# EAGLE board XIAO ESP32C3 (EAGLE 6.4)
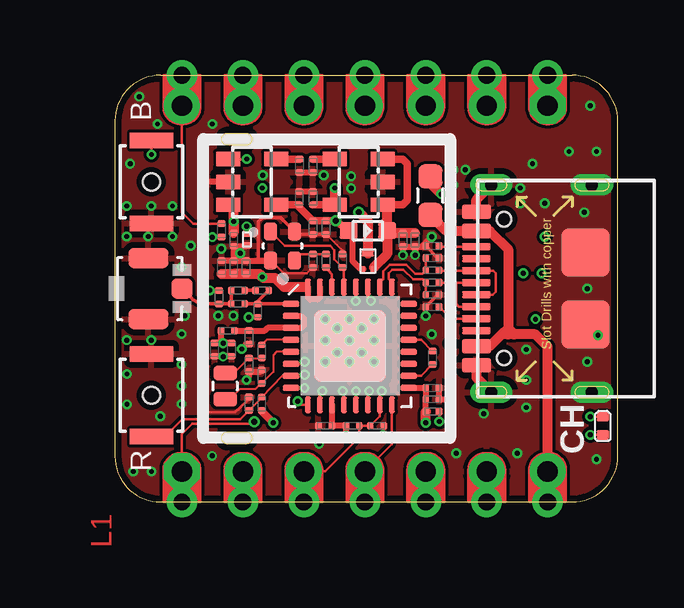
[diagram p0: board, top side]
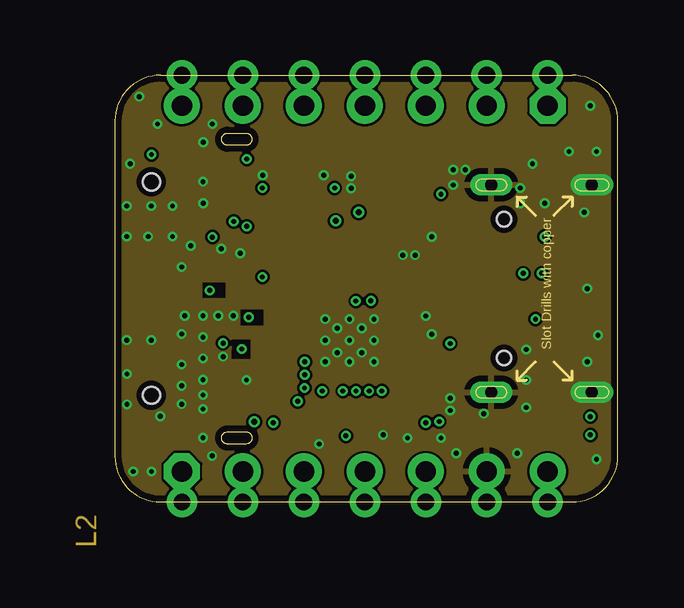
[diagram p1: board, inner layer Route2]
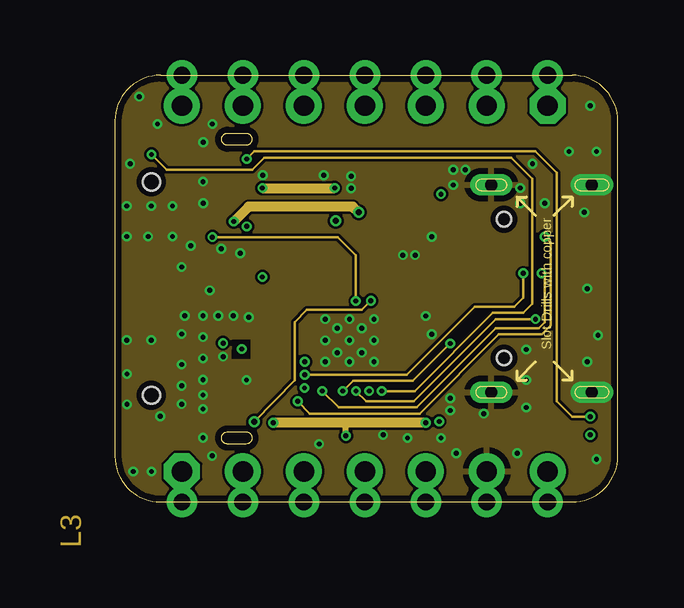
[diagram p2: board, inner layer Route15]
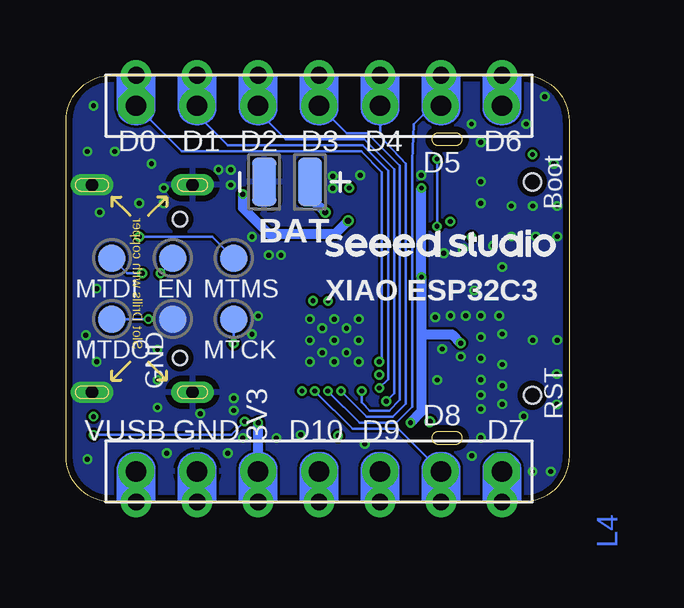
[diagram p3: board, bottom side, seen from below]

Size 20.95 x 17.78 mm. Coordinates in mm from the lower left corner, seen from the top.
Outline: 20.95,1.9 20.95,15.88 arc90 19.05,17.78 1.91,17.78 arc90 0,15.88 0,1.9 arc90 1.91,0 19.05,0 arc90 20.95,1.9
Outline: 4.7,2.92 5.46,2.92 arc-90 5.72,2.67 arc-90 5.46,2.41 4.7,2.41 arc-90 4.44,2.67 arc-90 4.7,2.92
Outline: 4.7,15.37 5.46,15.37 arc-90 5.72,15.11 arc-90 5.46,14.86 4.7,14.86 arc-90 4.44,15.11 arc-90 4.7,15.37
Copper layers (1*2*15*16): Top 0.035mm / dielectric 0.2mm / Route2 0.0175mm / dielectric 0.3mm / Route15 0.0175mm / dielectric 0.2mm / Bottom 0.035mm
Design rules "SeeedStudio_4layer_DRU_no_angle_20140221 *": minimum track width 1mil, minimum drill 8mil, track to track 4mil, track to pad 4mil, pad to pad 4mil, via to via 4mil, smd to smd 0mil, copper to edge 10mil, drill to drill 8mil, minimum pad ring 4mil, minimum via ring 4mil, stop-mask expansion 4mil, vias tented up to drill 25mil, thermal gap 10mil
Net classes: 0 default: width 0.089 mm, drill 0.2 mm, clearance 0.102 mm
tRestrict: area 3.7,8.5 to 4.6,9.1; area 5.3,7.4 to 6.2,8; area 4.9,6 to 5.6,6.7

## Footprints (pad centres in the part's own frame; a part is rotated, then mirrored left to right if it is on the bottom)
U-FL3P-SMD-2.6X2.6X1.0MM = smd 0.889 x 0.838: D -1.397,0 | smd 1.676 x 0.838: GND1 0,1.27; GND2 0,-1.27
TP-80X40MIL = smd 2.032 x 1.016: 1 0,0
BUTTON_TD1183SA = smd 0.65 x 1.8: 1 -1.725,0; 2 1.725,0 | hole 0.7: 0,0
C0201 = smd 0.279 x 0.318: 1 -0.279,0; 2 0.279,0
LED-0402 = smd 0.385 x 0.508: + -0.383,0; - 0.383,0
SOD-523 = smd 0.762 x 0.7: + 0.8,0; - -0.8,0
F0603 = smd 1 x 1: 1 -0.8,0; 2 0.8,0
H7-HALF-HOLE-2.54 = drill 0.85 pad 1.5 octagon: 1 0,7.62 | drill 0.85 pad 1.5: 2 0,5.08; 3 0,2.54; 4 0,0; 5 0,-2.54; 6 0,-5.08; 7 0,-7.62 | drill 0.7 pad 1.27: 13 -1.27,7.62; 14 -1.27,5.08; 15 -1.27,2.54; 16 -1.27,0; 17 -1.27,-2.54; 18 -1.27,-5.08; 19 -1.27,-7.62
L0201 = smd 0.279 x 0.318: 1 -0.279,0; 2 0.279,0
PMOS_1.0*0.6*0.35MM = smd 0.5 x 0.25: 1 0,0.325 | smd 0.15 x 0.25: 2 -0.175,-0.325; 3 0.175,-0.325
R0201 = smd 0.279 x 0.318: 1 -0.279,0; 2 0.279,0
R0201' = smd 0.279 x 0.318: 1 -0.254,0; 2 0.254,0
TP-D45MIL = smd 1.143 x 1.143: T 0,0
SOT-25 = smd 0.6 x 1: 1 -0.95,-1; 2 0,-1; 3 0.95,-1; 4 0.95,1; 5 -0.95,1
QFN32G-0.5-5X5MM = smd 0.25 x 0.7: 1 -1.75,-2.45; 2 -1.25,-2.45; 3 -0.75,-2.45; 4 -0.25,-2.45; 5 0.25,-2.45; 6 0.75,-2.45; 7 1.25,-2.45; 8 1.75,-2.45; 17 1.75,2.45; 18 1.25,2.45; 19 0.75,2.45; 20 0.25,2.45; 21 -0.25,2.45; 22 -0.75,2.45; 23 -1.25,2.45; 24 -1.75,2.45 | smd 0.7 x 0.25: 9 2.45,-1.75; 10 2.45,-1.25; 11 2.45,-0.75; 12 2.45,-0.25; 13 2.45,0.25; 14 2.45,0.75; 15 2.45,1.25; 16 2.45,1.75; 25 -2.45,1.75; 26 -2.45,1.25; 27 -2.45,0.75; 28 -2.45,0.25; 29 -2.45,-0.25; 30 -2.45,-0.75; 31 -2.45,-1.25; 32 -2.45,-1.75 | smd 3 x 3: 33 0,0
USB2.0-TYPE-C = smd 1.2 x 0.6: A1_B12 0.05,3.2; A4_B9 0.05,2.4; B1_A12 0.05,-3.2; B4_A9 0.05,-2.4 | smd 1.2 x 0.3: A5 0.05,1.25; A6 0.05,0.25; A7 0.05,-0.25; A8 0.05,-1.25; B5 0.05,-1.75; B6 0.05,-0.75; B7 0.05,0.75; B8 0.05,1.75 | drill 0.508 pad 0.889 long: S1 -4.763,4.318; S2 -4.763,-4.318; S3 -0.572,4.318; S4 -0.572,-4.318 | smd 2 x 2: S5 -4.5,1.5; S6 -4.5,-1.5 | hole 0.6: -1.1,-2.89; -1.1,2.89
X2-SMD-1.6X1.0X0.5MM = smd 0.6 x 1: 1 -0.55,0; 2 0.55,0
X4-SMD-2.0X1.6X0.5MM = smd 0.75 x 0.55: 1 -0.6,-0.5; 2 0.6,-0.5; 3 0.6,0.5; 4 -0.6,0.5

## Placement (x,y rotation side)
ANT  U.FL-R-SMT-1  [U-FL3P-SMD-2.6X2.6X1.0MM]  1.4,8.89 180 top
BAT  DNP  [TP-80X40MIL]  10.8,13.34 270 bottom
BOOT  TD-1183SN-A3N-D1R  [BUTTON_TD1183SA]  1.52,13.34 90 top
C1  2.2uF  [C0201]  12.51,10.92 270 top
C2  1uF  [C0201]  13.23,4.28 180 top
C3  100nF  [C0201]  13.23,4.75 180 top
C4  2.2uF  [C0201]  12,10.92 270 top
C5  100nF  [C0201]  5.59,4.09 270 top
C6  10pF  [C0201]  10.92,3.17 180 top
C7  100nF  [C0201]  8.76,3.17 0 top
C8  18pF  [C0201]  5.59,5.71 270 top
C9  18pF  [C0201]  6.12,5.22 90 top
C10  100nF  [C0201]  8.25,11.43 90 top
C11  DNP  [C0201]  13.23,8.64 180 top
C12  DNP  [C0201]  13.23,10.16 180 top
C13  DNP  [C0201]  8.25,14.01 90 top
C14  1.6pF  [C0201]  5.96,7.98 90 top
C15  0R  [C0201]  6.13,8.81 180 top
C23  2.2uF  [C0201]  8.25,12.66 270 top
C39  2.2uF  [C0201]  7.68,12.66 270 top
C40  2.2uF  [C0201]  4.95,10.93 270 top
C41  18pF  [C0201]  8.25,10.05 270 top
C42  18pF  [C0201]  9.49,10.05 90 top
C43  2.2uF  [C0201]  4.44,9.78 270 top
C44  1uF  [C0201]  5.46,9.78 270 top
C45  100nF  [C0201]  4.95,9.78 270 top
C48  1.6pF  [C0201]  4.34,8.53 270 top
C49  0R  [C0201]  5.13,8.81 180 top
C50  100nF  [C0201]  5.59,6.86 90 top
C53  100nF  [C0201]  4.86,6.35 90 top
C54  2.2uF  [C0201]  4.15,6.35 90 top
CHG  RED  [LED-0402]  20.33,3.17 90 top
D1  MSK4005  [SOD-523]  10.54,11.3 180 top
F1  6V_500mA_Fuse  [F0603]  13.14,12.76 90 top
GND  DNP  [TP-80X40MIL]  12.7,13.34 270 bottom
J1  DNP  [H7-HALF-HOLE-2.54]  10.41,1.27 90 top
J2  DNP  [H7-HALF-HOLE-2.54]  10.41,16.51 270 top
L1  2nH  [L0201]  5.13,8.25 0 top
L3  2nH  [L0201]  4.7,7.14 0 top
Q1  LP0404N3T5G  [PMOS_1.0*0.6*0.35MM]  10.54,10.03 0 top
R1  5.1k  [R0201]  13.23,10.67 0 top
R2  5.1k  [R0201]  13.23,8.13 180 top
R3  DNP  [R0201]  13.23,6.01 270 top
R4  10k  [R0201]  6.12,4.09 270 top
R5  1R  [R0201]  4.44,11.32 270 top
R6  10k  [R0201]  9.91,3.17 180 top
R7  0R  [R0201]  6.12,6.27 270 top
R8  22R  [R0201]  13.23,9.65 180 top
R9  100k  [R0201]  8.8,11.43 90 top
R10  22R  [R0201]  13.23,9.14 180 top
R21  DNP  [R0201']  5.5,10.93 270 top
R22  2.7k  [R0201]  7.7,14.01 270 top
R31  2.2k  [R0201]  13.23,3.77 0 top
R32  0R  [R0201]  8.8,10.05 90 top
RST  TD-1183SN-A3N-D1R  [BUTTON_TD1183SA]  1.52,4.45 270 top
TP1  DNP  [TP-D45MIL]  16.51,7.62 90 bottom
TP2  DNP  [TP-D45MIL]  13.97,10.16 90 bottom
TP3  DNP  [TP-D45MIL]  19.05,10.16 90 bottom
TP4  DNP  [TP-D45MIL]  13.97,7.62 90 bottom
TP5  DNP  [TP-D45MIL]  19.05,7.62 90 bottom
TP6  DNP  [TP-D45MIL]  16.51,10.16 90 bottom
U1  [SOT-25]  5.72,13.34 270 top
U2  XC6210B332MR  [SOT-25]  10.16,13.34 90 top
U4  ESP32-C3FN4  [QFN32G-0.5-5X5MM]  9.79,6.5 270 top
U$2  [LOGO-SEEED-NEW-1X9.6MM]  10.16,10.16 0 bottom
USB  UBF31-0171  [USB2.0-TYPE-C]  15.11,8.89 180 top
X2  32.768k/9KAA32768122TF90QT  [X2-SMD-1.6X1.0X0.5MM]  4.6,4.83 90 top
X4  40MHz/306011037  [X4-SMD-2.0X1.6X0.5MM]  6.98,10.67 270 top

## Library data of the parts
ANT J1 J2 = Connector-new
BAT C1-C15 C23 C39-C45 C48-C50 C53 C54 D1 F1 GND L1 L3 R1-R10 R22 R31 R32 X2 X4 = Discrete-new
BOOT RST = BUTTON_TD1183SA
CHG = Discrete-small
Q1 = PMOS_1006
R21 = GroveX
TP1-TP6 = Discrete-new; PARTNO: DNP
U1 U2 = PMIC
U4 = IC-new
U$2 = logo
USB = USB C

## Nets
32K_N: C9.1 U4.5 X2.1
32K_P: R7.1 U4.4
!CHG: CHG.- R21.1 U1.1
D0: J2.1 J2.13 U4.6
D1: J2.2 J2.14 U4.8
D2: J2.3 J2.15 TP2.T U4.9
D3: J2.4 J2.16 TP3.T U4.10
D4: J2.5 J2.17 TP4.T U4.12
D5: J2.6 J2.18 TP5.T U4.13
D8: J1.2 J1.14 U4.14
D9: BOOT.2 C6.2 J1.3 J1.15 R6.1 U4.15
D10: J1.4 J1.16 U4.16
DM: R10.1 USB.A7 USB.B7
DP: R8.1 USB.A6 USB.B6
EN: C5.2 R4.1 RST.2 TP6.T U4.7
ESP_USB_DM: C11.2 R10.2 U4.25
ESP_USB_DP: C12.2 R8.2 U4.26
GND: ANT.GND1 ANT.GND2 BOOT.1 C1.2 C2.1 C3.1 C4.2 C5.1 C6.1 C7.1 C8.2 C9.2 C10.1 C11.1 C12.1 C13.1 C14.1 C23.1 C39.1 C40.2 C41.2 C42.2 C43.1 C44.1 C45.1 C48.1 C50.1 C53.1 C54.1 GND.1 J1.6 J1.18 R1.1 R2.2 R9.1 R21.2 R22.2 RST.1 TP1.T U1.2 U2.2 U4.33 USB.A1_B12 USB.B1_A12 USB.S1 USB.S2 USB.S3 USB.S4 USB.S5 USB.S6 X4.2 X4.4
N$1: R2.1 USB.A5
N$2: R1.2 USB.B5
N$3: R3.1 U4.21
N$4: C8.1 R7.2 X2.2
N$5: C13.2 U2.4
N$6: C15.2 C49.1
N$11: R22.1 U1.5
N$12: CHG.+ R31.2
N$22: C14.2 C15.1 L1.2 U4.1
N$26: C41.1 R32.2 X4.3
N$27: C42.1 U4.29 X4.1
N$28: ANT.D C48.2 C49.2 L1.1
N$29: R5.2 U4.28
N$34: C50.2 L3.2 U4.2 U4.3
N$36: R32.1 U4.30
RX_D7: J1.1 J1.13 U4.27
TX_D6: J2.7 J2.19 R5.1
USB_FUSED_5V: C10.2 C39.2 D1.+ F1.2 Q1.2 R9.2 U1.4
VBAT: BAT.1 C40.1 Q1.1 U1.3
VCC_3V3: C2.2 C3.2 C7.2 C23.2 C43.2 C44.2 C45.2 C53.2 C54.2 J1.5 J1.17 L3.1 R4.2 R6.2 R31.1 U2.5 U4.11 U4.17 U4.31 U4.32
VDD_SPI: R3.2 U4.18
VIN: C1.1 C4.1 D1.- Q1.3 U2.1 U2.3
VUSB: F1.1 J1.7 J1.19 USB.A4_B9 USB.B4_A9

## Tracks (layer width: path | path; a pad name or v marks a point on that pad's centre or on a via)
32K_N
  Top 0.089: U4.5 6.73,6.25 6.6,6.12 6.6,5.42 C9.1 6.08,4.94 5.84,4.7 5.21,4.7 4.78,4.28 X2.1
32K_P
  Top 0.089: U4.4 6.32,6.75 R7.1
!CHG  (via drill 0.2 pad 0.41)
  Top 0.102: CHG.- 19.69,3.56 v19.81,3.56 | v5.5,14.29 U1.1 | R21.1 v5.5,11.48
  Route15 0.102: v19.81,3.56 19.05,3.56 18.42,4.19 18.42,13.72 17.53,14.61 5.82,14.61 v5.5,14.29
  Bottom 0.102: v5.5,11.48 v5.5,14.29
D0  (via drill 0.2 pad 0.41)
  Top 0.102: U4.6 7.81,5.75 v7.91,5.84
  Bottom 0.102: J2.13 J2.1 16.13,14.61 8.66,14.61 7.8,13.74 7.8,6.49 7.8,5.99 7.8,5.96 v7.91,5.84
D1  (via drill 0.2 pad 0.41)
  Top 0.102: U4.8 v7.9,4.75
  Bottom 0.102: J2.14 J2.2 15.49,16.13 14.22,14.86 8.61,14.86 7.54,13.79 7.54,5.11 v7.9,4.75
D2  (via drill 0.2 pad 0.41)
  Top 0.102: U4.9 7.76,4.05 v7.62,4.19
  Route15 0.102: 7.75,4.06 v7.62,4.19 8.13,3.68 12.7,3.68 16,6.98 17.78,6.98 18.16,7.37 18.16,10.79 v17.91,11.05
  Bottom 0.102: J2.15 J2.3 12.95,16.13 12.83,16.13 11.81,15.11 8.52,15.11 7.27,13.86 7.27,4.54 v7.62,4.19 | v17.91,11.05 14.86,11.05 TP2.T
D3  (via drill 0.2 pad 0.41)
  Top 0.102: U4.10 8.54,4.53 v8.64,4.62
  Route15 0.102: v8.64,4.62 9.32,3.94 12.57,3.94 15.88,7.24 17.65,7.24 17.91,7.49 17.91,9.4 v17.78,9.52
  Bottom 0.102: 10.29,16.38 J2.4 9.27,15.37 8.41,15.37 7.05,14.01 7.05,4.25 7.49,3.81 8.3,3.81 8.64,4.15 v8.64,4.62 | 10.29,16.38 10.29,17.65 J2.16 | 10.29,16.38 10.29,15.88 | v17.78,9.52 18.42,9.52 TP3.T
D4  (via drill 0.2 pad 0.41)
  Top 0.102: U4.12 9.54,4.58 v9.5,4.62
  Route15 0.102: v9.5,4.62 9.93,5.05 12.42,5.05 v13.97,6.6
  Bottom 0.102: J2.17 J2.5 7.87,15.24 6.79,14.1 6.79,4.1 7.34,3.56 8.43,3.56 v9.5,4.62 | v13.97,6.6 TP4.T
D5  (via drill 0.2 pad 0.41)
  Top 0.102: v10.05,4.62 10.05,4.18 U4.13
  Route15 0.102: v17.53,7.62 15.88,7.62 12.45,4.19 10.48,4.19 v10.05,4.62
  Bottom 0.102: J2.18 J2.6 5.72,16.51 6.48,15.75 6.54,14.22 6.54,3.96 7.2,3.3 8.72,3.3 v10.05,4.62 | v17.53,7.62 TP5.T
D8  (via drill 0.2 pad 0.41)
  Top 0.102: J1.14 J1.2 | U4.14 10.54,4.57 v10.59,4.62
  Bottom 0.102: J1.2 7.11,3.05 9.02,3.05 v10.59,4.62
D9  (via drill 0.2 pad 0.41)
  Top 0.102: J1.15 J1.3 8.76,1.27 10.19,2.69 R6.1 C6.2 11.04,3.57 U4.15 11.04,4.54 v11.12,4.62 | v1.52,14.48 BOOT.2
  Route15 0.102: v11.12,4.62 12.5,4.62 15.75,7.87 17.02,7.87 17.4,8.25 17.4,13.46 16.51,14.35 6.22,14.35 5.72,13.84 2.16,13.84 v1.52,14.48
D10
  Top 0.102: U4.16 11.54,2.4 J1.4
  Bottom 0.102: J1.16 J1.4
DM
  Top 0.102: USB.A7 14.22,9.14 | 14.22,9.14 13.49,9.14 R10.1 | USB.B7 14.33,8.14 14.22,8.25 14.22,9.14
DP
  Top 0.102: USB.A6 15.75,8.64 15.88,8.76 15.88,9.52 15.76,9.64 USB.B6 13.5,9.64 R8.1
EN  (via drill 0.2 pad 0.41)
  Top 0.089: U4.7 6.98,5.25 R4.1
  Top 0.102: U4.7 7.87,5.25 v7.91,5.3 | R4.1 6.1,4.32 C5.2 5.22,3.45 2.81,3.45 2.29,2.92 1.72,2.92 RST.2
  Route15 0.102: v7.91,5.3 12.15,5.3 14.99,8.13 16.64,8.13 17.02,8.51 v17.02,9.52
  Bottom 0.102: TP6.T 16.51,10.03 v17.02,9.52
ESP_USB_DM
  Top 0.102: C11.2 R10.2 12.83,9.27 12.42,9.27 12.02,9.67 11.55,9.67 11.4,9.52 11.4,9.3 11.54,9.16 U4.25
ESP_USB_DP
  Top 0.102: C12.2 R8.2 12.81,9.51 12.52,9.51 12.14,9.89 11.46,9.89 11.19,9.61 11.19,9.28 11.04,9.14 U4.26
GND  (via drill 0.2 pad 0.41)
  Top 0.102: C41.2 8,9.52 7.03,9.52 X4.2 | C42.2 9.49,10.46 R9.1 | C6.1 11.2,2.82 v11.18,2.79 | 3.81,3.73 5,3.73 5.14,3.86
  Top 0.127: 5.55,4.27 5.14,3.86
  Top 0.145: C14.1 v5.58,7.7 | C48.1 v3.95,8.81
  Top 0.152: C11.1 13.46,8.64 R2.2 v12.95,7.75 | C12.1 13.46,10.16 R1.1 | X4.4 6.91,11.85 6.13,11.85 5.97,11.68 5.97,10.06 | 7.6,11.15 C10.1 R9.1 | 5.59,4.34 C5.1 5.55,4.27 | 3.81,3.73 v3.67,3.87
  Top 0.254: C1.2 C4.2 v12,10.29 | C1.2 12.93,10.64 R1.1 12.95,10.79 | 12.95,10.79 v13.21,11.05 | C45.1 C44.1 5.97,10.06 6.47,10.06 X4.2 | C45.1 C43.1 | 5.08,10.06 C45.1 | C9.2 6.06,5.44 C8.2 5.59,5.23 v5.49,5.08 | C1.2 v12.51,10.29 | 7.6,11.15 X4.4 | R21.2 5.47,10.66 C40.2 C45.1 | R22.2 C13.1 | C39.1 C23.1 | U1.2 3.68,13.34 v3.67,13.35 | C3.1 C2.1 13.93,4.28 v13.97,4.32 | C1.2 12.8,10.64 12.95,10.79 | C50.1 5.47,6.58 v5.28,6.38 | C53.1 C54.1
  Top 0.406: USB.B1_A12 15.06,12.59 USB.S4 | USB.A1_B12 15.06,5.19 USB.S3
  Bottom 0.406: 12.51,12.76 GND.1
  other vias: 9.78,6.73 8.76,7.62 10.8,7.62 10.8,6.73 10.8,5.84 9.78,5.84 8.76,5.84 8.76,6.73 9.78,7.62 4.51,6.06 3.67,5.98 3.67,6.87 3.67,5.09 2.91,7.76 3.67,2.68 2.78,9.79 3.16,10.68 2.78,4.08 17.14,3.94 0.5,12.33 1.51,12.33 2.4,12.33 0.5,11.06 1.38,11.06 2.4,11.06 0.5,6.74 1.51,6.74 2.78,7 2.78,5.73 17.14,5.08 18.92,14.61 19.81,16.51 4.06,15.75 3.68,12.45 17.14,6.35 19.56,12.06 19.69,8.89 19.69,5.84 20.07,1.78 16.76,2.03 9.84,13.58 8.7,13.61 9.84,13.07 3.67,4.46 4.05,1.92 8.51,2.41 3.67,7.76 4.43,10.55 5.22,10.36 13.97,3.81 20.07,14.61 14.1,13.84 14.1,13.21 15.37,3.68 6.16,13.61 3.68,14.99 16.89,13.08 16.89,12.45 14.61,13.84 17.91,12.45 17.4,14.1 13.21,6.98 1.78,15.75 1.02,16.89 0.64,14.1 0.51,5.33 0.51,4.06 0.76,1.27 1.52,1.27 14.22,2.03 12.19,2.67 13.59,2.67 20.13,6.95 2.78,4.84 1.89,3.57 4.94,7.76 4.31,7.76 9.27,7.24 10.29,7.24 10.29,6.22 9.27,6.22
  pour Top (isolate 0.127): -0.13,17.78 21.08,17.78 21.08,0 -0.13,0
  pour Route2: -0.13,17.78 21.08,17.78 21.08,0 -0.76,0 -0.76,1.9 -0.13,1.9
  pour Route15: -0.13,17.78 21.08,17.78 21.08,0 -1.4,0 -1.4,1.9 -0.13,1.9
  pour Bottom: -0.13,17.78 21.08,17.78 21.08,0 -2.03,0 -2.03,1.9 -0.13,1.9
N$1
  Top 0.102: USB.A5 14,7.64 R2.1
N$2
  Top 0.102: USB.B5 13.54,10.64 R1.2
N$3
  Top 0.102: U4.21 12.77,6.75 R3.1
N$4
  Top 0.089: C8.1 R7.2 | 4.87,5.63 X2.2 5.07,5.48 C8.1 | C8.1 5.39,5.79
N$5
  Top 0.305: C13.2 U2.4
N$6
  Top 0.145: C49.1 C15.2
N$7
  cutout Route2: 3.68,9.14 4.57,9.14 4.57,8.51 3.68,8.51
N$8
  cutout Route2: 5.27,8 6.16,8 6.16,7.37 5.27,7.37
N$9
  cutout Route2: 4.88,5.98 5.64,5.98 5.64,6.74 4.89,6.74
  cutout Route15: 4.88,5.98 5.64,5.98 5.64,6.74 4.89,6.74
N$11
  Top 0.305: R22.1 U1.5
N$12  (via drill 0.2 pad 0.41)
  Top 0.102: CHG.+ v19.81,2.79 | R31.2 v13.51,3.35
  Bottom 0.102: v13.51,3.35 14.07,2.79 v19.81,2.79
N$22
  Top 0.145: C14.2 L1.2 | U4.1 6.09,8.25 C14.2 | C14.2 5.96,8.36 C15.1
N$26
  Top 0.102: R32.2 C41.1 7.74,10.32 X4.3
N$27
  Top 0.102: U4.29 9.54,9.71 C42.1 9.14,10.11 9.14,10.49 8.97,10.67 7.08,10.67 X4.1
N$28
  Top 0.145: ANT.D 3.2,8.48 arc45 3.75,8.25 C48.2 L1.1 C49.2
N$29  (via drill 0.2 pad 0.41)
  Top 0.102: U4.28 v10.04,8.37 | R5.2 v4.06,11.04
  Route15 0.102: v10.04,8.37 10.04,10.28 9.28,11.04 v4.06,11.04
N$34
  Top 0.254: U4.2 7.74,7.75 7.87,7.62 7.87,7.37 7.76,7.25 U4.3 6.36,7.25 6.25,7.14 C50.2 L3.2
N$36
  Top 0.102: U4.30 9.04,9.49 R32.1
RX_D7  (via drill 0.2 pad 0.41, 0.25 pad 0.41)
  Top 0.102: J1.13 J1.1 2.79,2.82 3.23,3.25 5.71,3.25 v5.8,3.34 | U4.27 10.54,8.51 v10.67,8.38
  Route15 0.102: v10.67,8.38 10.29,8 8,8 7.49,7.49 7.49,5.08 v5.8,3.34
  Bottom 0.102: J1.1 3.05,1.27
TX_D6
  Top 0.102: J2.19 J2.7 2.79,12.06 3.26,11.59 R5.1
USB_FUSED_5V  (via drill 0.2 pad 0.41, 0.25 pad 0.41)
  Top 0.254: D1.+ 9.91,11.01 9.91,10.03 10.23,9.71 Q1.2
  Top 0.305: 7.58,12.38 C39.2 7.68,12.28 | U1.4 7.58,12.38 | D1.+ v9.21,11.71 R9.2 C10.2 7.68,12.28 | 7.58,12.38 7.68,12.28
  Top 0.406: 12.93,13.78 F1.2 13.14,13.27 v13.59,12.83
  Bottom 0.305: v9.21,11.71 9.21,11.62
  Bottom 0.406: v13.59,12.83 13.59,12.25 12.51,11.18 9.74,11.18 v9.21,11.71
VBAT  (via drill 0.2 pad 0.41, 0.25 pad 0.41)
  Top 0.305: v4.95,11.68 4.95,12.15 U1.3
  Top 0.406: v10.16,12.06 10.54,11.68 Q1.1 | v4.95,11.68 C40.1 4.95,12.32
  Route15 0.406: v10.16,12.06 9.92,12.31 5.58,12.31 v4.95,11.68
  Bottom 0.406: v10.16,12.06 10.67,12.57 10.67,13.21 BAT.1
VCC_3V3  (via drill 0.2 pad 0.41)
  Top 0.254: J1.17 J1.5 | C44.2 5.46,9.52 | U4.11 C7.2 R6.2 v9.63,2.76 | U4.17 C3.2 C2.2 R31.1 | U4.31 8.54,8.54 8.44,8.45 8.13,8.45 8.04,8.53 U4.32 7.88,8.95 7.87,8.95 | C53.2 C54.2 4.5,6.63 v4.51,6.62 4.42,6.71 L3.1
  Top 0.305: C23.2 U2.5 | R4.2 6.12,3.79 v6.6,3.3
  Top 0.406: v12.95,3.3 R31.1 | C44.2 C45.2 | C43.2 C45.2 | v9.16,13.08 U2.5 | 7.88,8.95 7.05,8.95 6.68,9.32 6.2,9.32 v6.15,9.37 6.02,9.5 C45.2
  Route15 0.254: v9.63,2.76 9.63,3.3
  Route15 0.406: v12.95,3.3 9.63,3.3 v6.6,3.3 | v6.15,13.08 v9.16,13.08
  Bottom 0.406: 13.28,1.6 J1.5 v12.95,3.3 | v6.15,13.08 v6.15,9.37 6.15,6.98 | 6.15,6.98 6.15,3.76 v6.6,3.3 | 6.15,6.98 4.88,6.98 v4.51,6.62
VDD_SPI
  Top 0.102: U4.18 12.76,5.25 R3.2
VIN
  Top 0.152: Q1.3 10.8,9.78 10.79,9.78 Q1.3 | U2.1 11.16,12.21 11.18,12.19 11.19,12.2 11.21,12.2
  Top 0.305: U2.3 12,14.29 12.19,14.1 12.19,12.57 12,12.38 U2.1
  Top 0.406: C1.1 C4.1 11.37,11.2 D1.- | D1.- 11.34,10.32 10.8,9.78 | D1.- 11.34,12.2 U2.1
VUSB
  Top 0.102: J1.19 J1.7
  Top 0.406: 16.38,7.24 16.38,10.54 15.63,11.29 USB.B4_A9 13.82,11.29 F1.1 | 16.38,7.24 16.38,6.98 | J1.7 18.03,6.48 17.53,6.98 16.64,6.98 | 16.64,6.98 16.38,6.98 | 16.38,6.98 16.13,6.98 | 16.13,6.98 16.12,6.98 15.62,6.49 USB.A4_B9 | 16.38,7.24 16.13,6.98 | 16.38,7.24 16.64,6.98

## Text on the board
Top: L1
Route2: L2
Route15: L3
Bottom: L4
tNames: LAYER STACK-UP - ALL DIMENSIONS IN MIL | B | 50ohm SINGLE ENDED / IMPEDANCE CONTROL +/-10% | 90ohm SINGLE ENDED / IMPEDANCE CONTROL +/-10% | 100ohm SINGLE ENDED / IMPEDANCE CONTROL +/-10% | L1-L2: 4mil | LAYER# | TRACE WIDTH | TRACE WIDTH / SPACE | TRACE WIDTH / SPACE | COPPER WEIGHT / (OZ) | LAYER 1 - GTL | HALF+PLATING=1OZ | 5.7 | 4/4 | LAYER 2 - GND | HALF=0.5OZ | CH | LAYER 3 - POWER | HALF=0.5OZ | R | LAYER 4 - GBL | HALF+PLATING=1OZ
bNames: D6 | D5 | D4 | D3 | D2 | D1 | D0 | Boot | BAT | XIAO ESP32C3 | MTMS | EN | MTDI | MTCK | MTDO | GND | RST | D8 | D7 | D9 | D10 | 3V3 | GND | VUSB